# Altium PCB PCB1.PcbDoc
Units mil, origin at the board's own origin, x right, y up, seen from the top; angles counter-clockwise.
Board outline 6000 x 4000 mil, 2 copper layers (Top Layer, Bottom Layer); 11 components, 128 nets, 309 pads, 12 vias.
Unrouted connection lines stored in the file: 129.
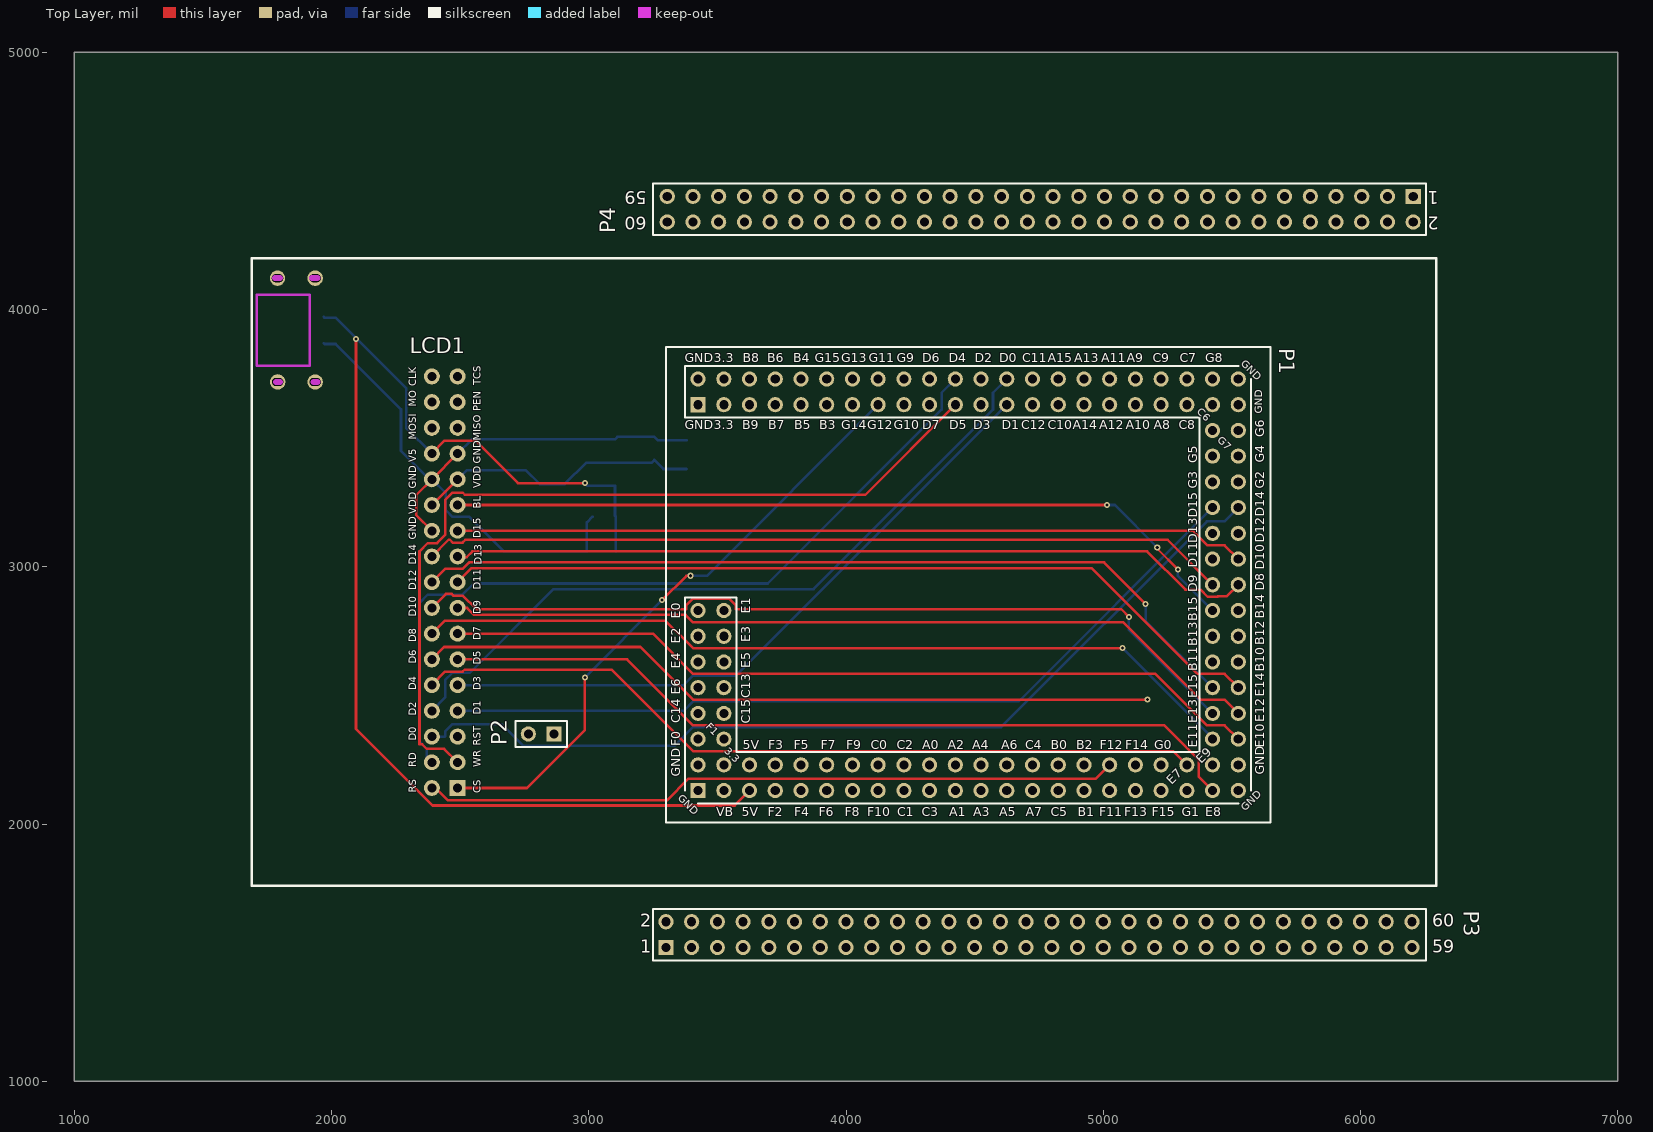
[diagram p0: Top Layer view]
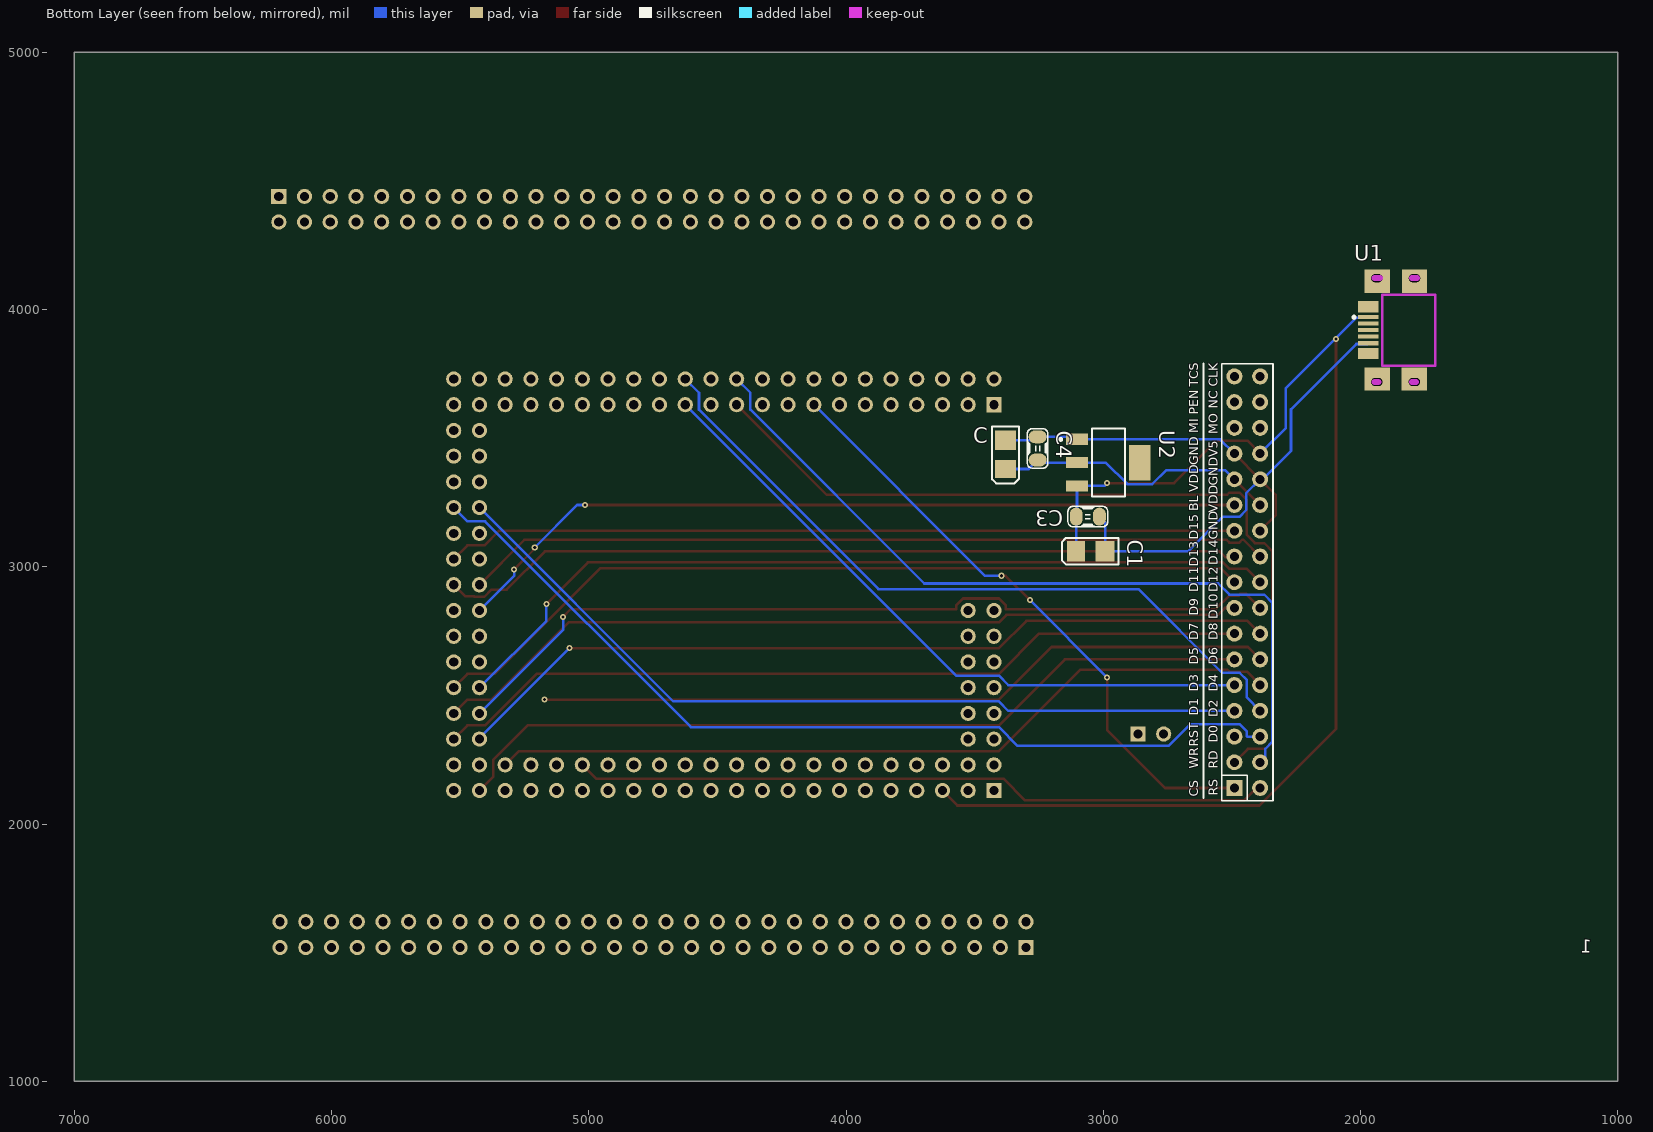
[diagram p1: Bottom Layer view, seen from below]

## Layer stack, top to bottom
Top Solder: solder mask 0.4, Solder Resist, Dk 3.5
Top Layer: signal copper 1.4
Dielectric 1: dielectric 12.6, FR-4, Dk 4.8
Bottom Layer: signal copper 1.4
Bottom Solder: solder mask 0.4, Solder Resist, Dk 3.5

## Board outline
1000,1000 7000,1000 7000,5000 1000,5000

## Design rules (kind name [scope] priority, off if disabled: settings)
Clearance [All] p1: gap=10
PolygonConnect [All] p1: connectstyle=Relief reliefconductorwidth=10 reliefentries=4 polygonreliefangle="90 Angle" airgapwidth=10
RoutingVias [All] p1: holewidth=28 width=50 viastyle="Through Hole" minholewidth=28 minwidth=50 maxholewidth=28 maxwidth=50
SolderMaskExpansion [All] p1: expansion=4
Width [All] p1: maxlimit=10 minlimit=10 preferedwidth=10
30 further rules are at their usual default settings.

## Components (designator, comment, footprint, x,y, rotation, side; value= is the part's Value field where it differs from the comment)
C "Cap Pol3" CAP_SMD_3216 3380,3380 r90 bottom
C1 "Cap Pol3" CAP_SMD_3216 3105,3060 r180 bottom
C3 "Cap" 0805C 3015,3195 r0 bottom
C4 "Cap" 0805C 3255,3505 r270 bottom
LCD1 "TFT_LCD2" DB2*17-3.5-1 2280,1865 r90 top
P1 "HeaderST" PCBComponent_1-1 4475,2930 r0 top
P2 "Header 2" HDR1X2 2865,2350 r180 top
P3 "Header 30X2" HDR2X30 3300,1520 r0 top
P4 "Header 30X2" HDR2X30 6205,4440 r180 top
U1 "micro USB" "Micro_USB_v2 - duplicate" 1955,3920 r90 bottom
U2 "1117-xx" SOT-223_ 2980,3405 r270 bottom

## Footprints (in the part's own frame and the unit in brackets; to place one, negate y for a bottom-side part, rotate by r counter-clockwise, add the part's x,y. Pads: shape width x height; smd on the part's side, far side on the other; paste and mask are expansions set on the pad)
0805C [mil] "0805封装电容"
  oval 50x70 smd: 1(0,0) 2(90,0)
  silkscreen extent -32,-40 122,40, body extent 3,-25 82,25, height 30
CAP_SMD_3216 [mil] "贴片钽电容，10uF"
  rect 70x80 smd: 1(0,0)
  rect 75x80 smd: 2(112.2,0)
  silkscreen extent -56,-52 165,52, body extent -11,-35 123,35, height 63
DB2*17-3.5-1 [mil]
  rect 62x62 hole 35: 1(275,-210)
  round 62 hole 35: 2(275,-110) 3(375,-210) 4(375,-110) 5(475,-210) 6(475,-110) 7(575,-210) 8(575,-110) 9(675,-210) 10(675,-110) 11(775,-210) 12(775,-110) 13(875,-210) 14(875,-110) 15(975,-210) 16(975,-110) 17(1075,-210) 18(1075,-110) 19(1175,-210) 20(1175,-110) 21(1275,-210) 22(1275,-110) 23(1375,-210) 24(1375,-110) 25(1475,-210) 26(1475,-110) 27(1575,-210) 28(1575,-110) 29(1675,-210) 30(1675,-110) 31(1775,-210) 32(1775,-110) 33(1875,-210) 34(1875,-110)
HDR1X2 [mm] "Connector; Header; 2 Position"
  rect 1.5x1.5 hole 0.9: 1(0,0)
  round 1.5 hole 0.9: 2(2.54,0)
  silkscreen extent -1.27,-1.27 3.81,1.27
HDR2X30 [mm] "Connector; Header; 30x2 Position"
  rect 1.5x1.5 hole 0.9: 1(0,0)
  round 1.5 hole 0.9: 2(0,2.54) 3(2.54,0) 4(2.54,2.54) 5(5.08,0) 6(5.08,2.54) 7(7.62,0) 8(7.62,2.54) 9(10.16,0) 10(10.16,2.54) 11(12.7,0) 12(12.7,2.54) 13(15.24,0) 14(15.24,2.54) 15(17.78,0) 16(17.78,2.54) 17(20.32,0) 18(20.32,2.54) 19(22.86,0) 20(22.86,2.54) 21(25.4,0) 22(25.4,2.54) 23(27.94,0) 24(27.94,2.54) 25(30.48,0) 26(30.48,2.54) 27(33.02,0) 28(33.02,2.54) 29(35.56,0) 30(35.56,2.54) 31(38.1,0) 32(38.1,2.54) 33(40.64,0) 34(40.64,2.54) 35(43.18,0) 36(43.18,2.54) 37(45.72,0) 38(45.72,2.54) 39(48.26,0) 40(48.26,2.54) 41(50.8,0) 42(50.8,2.54) 43(53.34,0) 44(53.34,2.54) 45(55.88,0) 46(55.88,2.54) 47(58.42,0) 48(58.42,2.54) 49(60.96,0) 50(60.96,2.54) 51(63.5,0) 52(63.5,2.54) 53(66.04,0) 54(66.04,2.54) 55(68.58,0) 56(68.58,2.54) 57(71.12,0) 58(71.12,2.54) 59(73.66,0) 60(73.66,2.54)
  silkscreen extent -1.27,-1.27 75.06,3.81
"Micro_USB_v2 - duplicate" [mm]
  round 1.524 hole 0.762 slot 1.1 at 90 deg: 0(-5.125,-0.475) 0(-5.12,-4.175) 0(5.125,-4.191) 0(5.125,-0.475)
  rect 0.4x2 smd: 1(1.3,0.381) 2(0.65,0.381) 3(0,0.381) 4(-0.65,0.381) 5(-1.3,0.381)
  rect 2.3x2.5 smd: ""(-4.826,-4.175) ""(-4.826,-0.508) ""(4.826,-4.191) ""(4.826,-0.508)
  rect 1.1x2 smd: ""(-2.3,0.381) ""(2.3,0.381)
  Keep-Out Layer lines w0.254: -3.5,-6.25 -3.5,-1 ; -3.45,-6.25 3.5,-6.25 3.5,-1 ; -3.45,-1 3.45,-1
  Keep-Out Layer lines w0.6: 5.125,-4.445 5.125,-3.962 ; -5.12,-4.335 -5.12,-3.962 ; 5.125,-0.762 5.125,-0.262 ; -5.125,-0.635 -5.125,-0.262
  silkscreen extent 1.15,1.65 1.4,1.9
PCBComponent_1-1 [mm]
  round 1.5 hole 0.9: 1(-26.67,-2.54) 2(-24.13,-2.54) 3(-26.67,-5.08) 4(-24.13,-5.08) 5(-26.67,-7.62) 6(-24.13,-7.62) 7(-26.67,-10.16) 8(-24.13,-10.16) 9(-26.67,-12.7) 10(-24.13,-12.7) 11(-26.67,-15.24) 12(-24.13,-15.24) 13(-26.67,-17.78) 15(-24.13,-17.78) 16(-24.13,-20.32) 18(-21.59,-20.32) 18(-21.59,-17.78) 19(-19.05,-17.78) 20(-19.05,-20.32) 21(-16.51,-17.78) 22(-16.51,-20.32) 23(-13.97,-17.78) 24(-13.97,-20.32) 25(-11.43,-17.78) 26(-11.43,-20.32) 27(-8.89,-17.78) 28(-8.89,-20.32) 29(-6.35,-17.78) 30(-6.35,-20.32) 31(-3.81,-17.78) 32(-3.81,-20.32) 33(-1.27,-17.78) 34(-1.27,-20.32) 35(1.27,-17.78) 36(1.27,-20.32) 37(3.81,-17.78) 38(3.81,-20.32) 39(6.35,-17.78) 40(6.35,-20.32) 41(8.89,-17.78) 42(8.89,-20.32) 43(11.43,-17.78) 44(11.43,-20.32) 45(13.97,-17.78) 46(13.97,-20.32) 47(16.51,-17.78) 48(16.51,-20.32) 49(19.05,-17.78) 50(19.05,-20.32) 51(21.59,-17.78) 52(21.59,-20.32) 53(24.13,-17.78) 54(24.13,-20.32) 55(26.67,-17.78) 56(26.67,-20.32) 57(26.67,-15.24) 58(24.13,-15.24) 59(26.67,-12.7) 60(24.13,-12.7) 61(26.67,-10.16) 62(24.13,-10.16) 63(26.67,-7.62) 64(24.13,-7.62) 65(26.67,-5.08) 66(24.13,-5.08) 67(26.67,-2.54) 68(24.13,-2.54) 69(26.67,0) 70(24.13,0) 71(26.67,2.54) 72(24.13,2.54) 73(26.67,5.08) 74(24.13,5.08) 75(26.67,7.62) 76(24.13,7.62) 77(26.67,10.16) 78(24.13,10.16) 79(26.67,12.7) 80(24.13,12.7) 81(26.67,15.24) 82(24.13,15.24) 83(26.67,17.78) 84(26.67,20.32) 85(24.13,17.78) 86(24.13,20.32) 87(21.59,17.78) 88(21.59,20.32) 89(19.05,17.78) 90(19.05,20.32) 91(16.51,17.78) 92(16.51,20.32) 93(13.97,17.78) 94(13.97,20.32) 95(11.43,17.78) 96(11.43,20.32) 97(8.89,17.78) 98(8.89,20.32) 99(6.35,17.78) 100(6.35,20.32) 101(3.81,17.78) 102(3.81,20.32) 103(1.27,17.78) 104(1.27,20.32) 105(-1.27,17.78) 106(-1.27,20.32) 107(-3.81,17.78) 108(-3.81,20.32) 109(-6.35,17.78) 110(-6.35,20.32) 111(-8.89,17.78) 112(-8.89,20.32) 113(-11.43,17.78) 114(-11.43,20.32) 115(-13.97,17.78) 116(-13.97,20.32) 117(-16.51,17.78) 118(-16.51,20.32) 119(-19.05,17.78) 120(-19.05,20.32) 121(-21.59,17.78) 122(-21.59,20.32) 123(-24.13,17.78) 124(-24.13,20.32) 126(-26.67,20.32)
  rect 1.5x1.5 hole 0.9: 14(-26.67,-20.32) 125(-26.67,17.78)
  silkscreen extent -29.84,-23.49 29.84,23.49
SOT-223_ [mm] "SOT-223/SC-73; 4 Leads; Body 6.7 x 7.3 mm, inc. leads (LxW max)"
  rect 1.1x2.15 smd: 1(-2.3,-3.1) 2(0,-3.1) 3(2.3,-3.1)
  rect 3.5x2.15 smd: 4(0,3.1)
  silkscreen extent -3.35,-4.85 3.35,1.62, body extent -3.25,-3.58 3.25,3.38, height 1.65

## Part data
C C1: "Polarized Capacitor (Surface Mount)"
C3 C4: "Capacitor"
P1 P3 P4: "Header, 30-Pin, Dual row"
P2: "Header, 2-Pin"
U1: library part usb-STM
U2: "稳压芯片"

## Via types
v1: diameter 23.62, hole 11.81, Top Layer to Bottom Layer, 12 vias

## Nets (pads, with @x,y where several pads share a name; then routed paths per layer and width w, separated by ;. In a path a pad name is that pad's centre, name@x,y a point inside that pad or via, vN(x,y) a via of type N, cw(c..) or ccw(c..) an arc to the next point about the centre after c; other vN are vias at no path point)
FSMC_A6: LCD1.2 P1.45 P3.45 | length 2712
  Top Layer w10: LCD1.2 2403.96,2140 2451.96,2092 3303.9,2092 3388.43,2176.53 4971.53,2176.53 P1.45
FSMC_D0: LCD1.6 P1.75 P4.9 | length 3584.7
  Bottom Layer w10: LCD1.6 2440.91,2340 2442,2341.09 2442,2359.88 2470.12,2388 2661.2,2388 2745.73,2303.47 3332.67,2303.47 3405.73,2376.53 4602.64,2376.53 5402.64,3176.53 5471.53,3176.53 P1.75
FSMC_D1: LCD1.7 P1.76 P4.10 | length 3262.2
  Bottom Layer w10: LCD1.7 3369.2,2440 3405.73,2476.53 4671.53,2476.53 P1.76
FSMC_D2: LCD1.8 P1.102 P4.36 | length 2847.6
  Bottom Layer w10: LCD1.8 2442,2492 2442,2559.88 2470.12,2588 2538,2588 2863,2913 3873.8,2913 4571.53,3610.73 4571.53,3676.53 P1.102
FSMC_D3: LCD1.9 P1.101 P4.35 | length 2586.5
  Bottom Layer w10: LCD1.9 3369.2,2540 3405.73,2576.53 3571.53,2576.53 P1.101
FSMC_D4: LCD1.10 P1.51 P3.51 | length 3113.1
  Top Layer w10: LCD1.10 2442,2592 2509.88,2592 2517.88,2600 3089.2,2600 3405.73,2283.47 5271.53,2283.47 P1.51
FSMC_D5: LCD1.11 P1.54 P3.54 | length 3184.8
  Top Layer w10: LCD1.11 3149.2,2640 3405.73,2383.47 5237.33,2383.47 5371.53,2249.27 5371.53,2183.47 P1.54
FSMC_D6: LCD1.12 P1.53 P3.53 | length 2886.1
  Top Layer w10: LCD1.12 2438,2688 3201.2,2688 3405.73,2483.47 v1(5171.53,2483.47)
FSMC_D7: LCD1.13 P1.57 | length 3204.8
  Top Layer w10: LCD1.13 3249.2,2740 3405.73,2583.47 5202.64,2583.47 5402.64,2383.47 5471.53,2383.47 P1.57
FSMC_D8: LCD1.14 P1.58 | length 3246.3
  Top Layer w10: LCD1.14 2440,2790 3299.2,2790 3405.73,2683.47 v1@5071.53,2683.47
  Bottom Layer w10: v1(5075,2685) 5425,2335 P1.58
FSMC_D9: LCD1.15 P1.59 | length 3204.8
  Top Layer w10: LCD1.15 2526.77,2840 2553.77,2813 3376.2,2813 3405.73,2783.47 5078.47,2783.47 5378.47,2483.47 5471.53,2483.47 P1.59
FSMC_D10: LCD1.16 P1.60 | length 3330.8
  Top Layer w10: LCD1.16 2445,2895 2467.12,2895 2474.12,2888 2509.88,2888 2562.88,2835 3378.47,2835 3378.47,2849.27 3405.73,2876.53 3544.27,2876.53 3571.53,2849.27 3571.53,2835 5070,2835 v1(5100,2805)
  Bottom Layer w10: v1(5100,2805) 5100,2755 P1.60
FSMC_D11: LCD1.17 P1.61 | length 3250.4
  Top Layer w10: LCD1.17 2545,2995 4955.11,2995 5366.64,2583.47 5471.53,2583.47 P1.61
FSMC_D12: LCD1.18 P1.62 | length 3306.7
  Top Layer w10: LCD1.18 2442,2992 2509.88,2992 2532.88,3015 2533.89,3015 2535.89,3017 5003,3017 v1(5165,2855)
  Bottom Layer w10: v1(5165,2855) 5165,2790 P1.62
FSMC_D13: LCD1.19 P1.69 P4.3 | length 3138.2
  Top Layer w10: LCD1.19 2493,3037 2524.77,3037 2547.77,3060 5170,3060 5319.27,2910.73 5378.47,2910.73 5405.73,2883.47 5444.27,2883.47 5445.8,2885 5480,2885 P1.69
FSMC_D14: LCD1.20 P1.70 P4.4 | length 3143.5
  Top Layer w10: LCD1.20 2455,3105 2459.95,3105 2470.95,3094 2509.05,3094 2520.05,3105 5250,3105 P1.70
FSMC_D15: LCD1.21 P1.71 P4.5 | length 3080.6
  Top Layer w10: LCD1.21 5349.2,3140 5405.73,3083.47 5471.53,3083.47 P1.71
FSMC_NE4: LCD1.1 P1.111 P4.45 | length 2372.3
  Top Layer w10: LCD1.1 2760,2140 2985,2365 v1(2985,2570) ; v1(3285,2870) 3380,2965 v1(3395,2965)
  Bottom Layer w10: v1(2985,2570) v1(3285,2870) ; v1(3395,2965) 3460,2965 P1.111
FSMC_NOE: LCD1.4 P1.106 P4.40 | length 3121.7
  Bottom Layer w10: LCD1.4 2370.12,2259.88 2370.12,2292 2342,2320.12 2342,2859.88 2374.12,2892 2509.88,2892 2552.88,2935 3695.8,2935 4371.53,3610.73 4371.53,3676.53 P1.106
FSMC_NWE: LCD1.3 P1.105 P4.39 | length 3332.2
  Top Layer w10: LCD1.3 2438,2292 2370.12,2292 2352.12,2310 2342,2310 2342,3059.88 2374.12,3092 2409.88,3092 2442,3124.12 2442,3259.88 2470.12,3288 2509.88,3288 2517.88,3280 4075,3280 P1.105
GND: C1.2 C3.1 C4.1 C.2 LCD1.22 LCD1.26 LCD1.27 U1.5 U2.1 | length 2948.2
  Top Layer w10: LCD1.22 2330,3200 2330,3280 LCD1.26 LCD1.27
  Bottom Layer w10: U1.5 1972.72,3866.1 2015.58,3866.1 2270,3611.68 2270,3450 2380,3340 LCD1.26 2444,3286 2444,3220.95 2470.95,3194 2536,3194 2670,3060 C1.2 2992.8,3172.8 C3.1 ; LCD1.27 2545.55,3495.55 U2.1 3111.5,3505 C4.1 3267.8,3492.2 C.2
H1: P1.1 P3.1
H2: P1.2 P3.2
H3: P1.3 P3.3
H4: P1.4 P3.4
H5: P1.5 P3.5
H6: P1.6 P3.6
H7: P1.7 P3.7
H8: LCD1.33 P1.8 P3.8
H9: P1.9 P3.9
H10: P1.10 P3.10
H11: P1.11 P3.11
H12: P1.12 P3.12
H13: P1.13 P3.13
H14: P1.14 P3.14
H15: P1.15 P3.15
H16: P1.16 P3.16
H17: C1.1 C3.2 LCD1.28 P1.18 P3.17 P3.18 U1.1 U2.3 | length 4983.9
  Top Layer w10: v1(2095,3885) 2095,2369.95 2392.95,2072 3567,2072 P1.18@3625,2130 ; LCD1.28 2440,3490 2560,3490 2725,3325 v1(2985,3325)
  Bottom Layer w10: U1.1 1972.72,3968.46 2015.58,3968.46 2290,3694.05 2290,3540 LCD1.28 ; v1(2985,3325) 2995.55,3314.45 U2.3 3102.05,3197.95 C3.2 C1.1
H19: P1.19 P3.19
H20: P1.20 P3.20
H21: P1.21 P3.21
H22: P1.22 P3.22
H23: P1.23 P3.23
H24: P1.24 P3.24
H25: P1.25 P3.25
H26: P1.26 P3.26
H27: P1.27 P3.27
H28: P1.28 P3.28
H29: P1.29 P3.29
H30: P1.30 P3.30
H31: P1.31 P3.31
H32: P1.32 P3.32
H33: P1.33 P3.33
H34: P1.34 P3.34
H35: P1.35 P3.35
H36: P1.36 P3.36
H37: P1.37 P3.37
H38: P1.38 P3.38
H39: P1.39 P3.39
H40: P1.40 P3.40
H41: LCD1.34 P1.41 P3.41
H42: P1.42 P3.42
H43: LCD1.29 P1.43 P3.43
H44: LCD1.31 P1.44 P3.44
H46: LCD1.30 P1.46 P3.46
H47: P1.47 P3.47
H48: P1.48 P3.48
H49: P1.49 P3.49
H50: P1.50 P3.50
H52: P1.52 P3.52
H55: P1.55 P3.55
H56: P1.56 P3.56
H63: P1.63 P3.57
H64: P1.64 P3.58
H65: P1.65 P3.59
H66: P1.66 P3.60
H67: P1.67 P4.1
H68: LCD1.23 P1.68 P4.2 | length 3122.4
  Top Layer w10: LCD1.23 v1(5015,3240) ; v1(5210,3075) 5210,3070 v1(5290,2990)
  Bottom Layer w10: v1(5015,3240) 5045,3240 v1(5210,3075) ; v1(5290,2990) 5290,2965 P1.68
H72: P1.72 P4.6
H73: P1.73 P4.7
H74: P1.74 P4.8
H77: P1.77 P4.11
H78: P1.78 P4.12
H79: P1.79 P4.13
H80: P1.80 P4.14
H81: P1.81 P4.15
H82: P1.82 P4.16
H83: P1.83 P4.17
H84: P1.84 P4.18
H85: P1.85 P4.19
H86: P1.86 P4.20
H87: P1.87 P4.21
H88: P1.88 P4.22
H89: P1.89 P4.23
H90: P1.90 P4.24
H91: P1.91 P4.25
H92: P1.92 P4.26
H93: P1.93 P4.27
H94: P1.94 P4.28
H95: P1.95 P4.29
H96: P1.96 P4.30
H97: P1.97 P4.31
H98: P1.98 P4.32
H99: P1.99 P4.33
H100: P1.100 P4.34
H103: P1.103 P4.37
H104: P1.104 P4.38
H107: P1.107 P4.41
H108: P1.108 P4.42
H109: P1.109 P4.43
H110: P1.110 P4.44
H112: P1.112 P4.46
H113: P1.113 P4.47
H114: P1.114 P4.48
H115: P1.115 P4.49
H116: P1.116 P4.50
H117: P1.117 P4.51
H118: P1.118 P4.52
H119: P1.119 P4.53
H120: P1.120 P4.54
H121: P1.121 P4.55
H122: P1.122 P4.56
H123: P1.123 P4.57
H124: P1.124 P4.58
H125: P1.125 P4.59
H126: P1.126 P4.60
RESET: LCD1.5 P2.1 P2.2
VCC3.3: C4.2 C.1 LCD1.24 LCD1.25 U2.2 | length 1122.5
  Top Layer w10: LCD1.24 LCD1.25
  Bottom Layer w10: LCD1.25 2526,3376 2754.52,3376 2809.42,3321.1 2906.49,3321.1 2990.39,3405 U2.2 3245,3405 C4.2 3290,3380 C.1
pads on no net: LCD1.32 U1. U1.0 U1.2 U1.3 U1.4 U2.4

## Silkscreen, mask and mechanical layers (free items; w line width, h text height)
Top Overlay:
  lines w10: 1690,1760 1690,4200 6295,4200 6295,1760 1690,1760

## Text inside footprints (layer, text, board x,y; h text height)
LCD1: Top Overlay "D14" at 2328.58,3007.13 h28 r90; Top Overlay "D7" at 2580,2715 h28 r90; Top Overlay "RS" at 2328.58,2121.3 h28 r90; Top Overlay "CS" at 2580,2120 h28 r90; Top Overlay "WR" at 2580,2220 h28 r90; Top Overlay "RST" at 2580,2305 h28 r90; Top Overlay "D1" at 2580,2425 h28 r90; Top Overlay "D2" at 2328.58,2421.5 h28 r90; Top Overlay "D3" at 2580,2520 h28 r90; Top Overlay "D4" at 2328.58,2519.92 h28 r90; Top Overlay "D5" at 2580,2620 h28 r90; Top Overlay "D6" at 2328.58,2623.27 h28 r90; Top Overlay "D8" at 2328.58,2706.93 h28 r90; Top Overlay "D9" at 2580,2815 h28 r90; Top Overlay "D13" at 2584.49,3007.13 h28 r90; Top Overlay "D12" at 2328.58,2908.7 h28 r90; Top Overlay "D15" at 2580,3110 h28 r90; Top Overlay "VDD" at 2580,3305 h28 r90; Top Overlay "V5" at 2328.58,3405.75 h28 r90; Top Overlay "GND" at 2328.58,3302.4 h28 r90; Top Overlay "VDD" at 2328.58,3203.98 h28 r90; Top Overlay "D10" at 2328.58,2805.35 h28 r90; Top Overlay "D0" at 2328.58,2323.07 h28 r90; Top Overlay "RD" at 2328.58,2219.72 h28 r90; Top Overlay "GND" at 2328.58,3105.55 h28 r90; Top Overlay "GND" at 2580,3400 h28 r90; Top Overlay "D11" at 2580,2910 h28 r90; Top Overlay "PEN" at 2580,3605 h28.03 r90; Top Overlay "CLK" at 2328.58,3701.02 h28.03 r90; Top Overlay "MOSI" at 2328.58,3494.33 h28.03 r90; Top Overlay "MO" at 2328.58,3622.28 h28.03 r90; Top Overlay "TCS" at 2580,3705 h28.03 r90; Top Overlay "MISO" at 2580,3490 h28.03 r90; Top Overlay "BL" at 2580,3225 h28 r90; Bottom Overlay "CS" at 2630,2105 h35 r270; Bottom Overlay "RS" at 2555,2110 h35 r270; Bottom Overlay "RD" at 2555,2215 h35 r270; Bottom Overlay "WR" at 2630,2215 h35 r270; Bottom Overlay "D0" at 2555,2315 h35 r270; Bottom Overlay "RST" at 2630,2300 h35 r270; Bottom Overlay "D1" at 2630,2420 h35 r270; Bottom Overlay "D2" at 2555,2415 h35 r270; Bottom Overlay "D3" at 2630,2515 h35 r270; Bottom Overlay "D4" at 2555,2515 h35 r270; Bottom Overlay "D5" at 2630,2620 h35 r270; Bottom Overlay "D6" at 2555,2620 h35 r270; Bottom Overlay "D7" at 2630,2715 h35 r270; Bottom Overlay "D8" at 2555,2715 h35 r270; Bottom Overlay "D9" at 2630,2810 h35 r270; Bottom Overlay "D10" at 2555,2795 h35 r270; Bottom Overlay "D11" at 2630,2900 h35 r270; Bottom Overlay "D12" at 2555,2900 h35 r270; Bottom Overlay "D13" at 2630,3000 h35 r270; Bottom Overlay "D14" at 2555,3005 h35 r270; Bottom Overlay "D15" at 2630,3105 h35 r270; Bottom Overlay "GND" at 2555,3105 h35 r270; Bottom Overlay "BL" at 2630,3215 h35 r270; Bottom Overlay "VDD" at 2555,3210 h35 r270; Bottom Overlay "VDD" at 2630,3290 h35 r270; Bottom Overlay "GND" at 2555,3315 h35 r270; Bottom Overlay "GND" at 2630,3395 h35 r270; Bottom Overlay "V5" at 2555,3425 h35 r270; Bottom Overlay "MI" at 2630,3520 h35 r270; Bottom Overlay "MO" at 2555,3515 h35 r270; Bottom Overlay "PEN" at 2630,3590 h35 r270; Bottom Overlay "NC" at 2555,3615 h35 r270; Bottom Overlay "TCS" at 2630,3700 h35 r270; Bottom Overlay "CLK" at 2555,3700 h35 r270
P1: Top Overlay "GND" at 5625,2191 h35 r90; Top Overlay "3.3" at 3486,3535 h35; Top Overlay "3.3" at 3486,3795 h35; Top Overlay "GND" at 3355,2184 h35 r90; Top Overlay "3.3" at 3525,2281 h30 r315; Top Overlay "5V" at 3598,2290 h35; Top Overlay "VB" at 3495,2030 h35; Top Overlay "5V" at 3595,2030 h35; Top Overlay "B11" at 5366,2593 h35 r90; Top Overlay "B10" at 5625,2592 h35 r90; Top Overlay "E15" at 5366,2489 h35 r90; Top Overlay "E14" at 5625,2494 h35 r90; Top Overlay "E13" at 5366,2392 h35 r90; Top Overlay "E12" at 5625,2395 h35 r90; Top Overlay "E11" at 5366,2297 h35 r90; Top Overlay "E10" at 5625,2296 h35 r90; Top Overlay "E9" at 5382,2233 h35 r45; Top Overlay "E8" at 5396,2030 h35; Top Overlay "E7" at 5267,2150 h35 r45; Top Overlay "G1" at 5306,2030 h35; Top Overlay "G0" at 5198,2290 h35; Top Overlay "F15" at 5189,2030 h35; Top Overlay "F14" at 5086,2290 h35; Top Overlay "F13" at 5082,2030 h35; Top Overlay "F12" at 4986,2290 h35; Top Overlay "F11" at 4984,2030 h35; Top Overlay "B2" at 4896,2290 h35; Top Overlay "B1" at 4901,2030 h35; Top Overlay "B0" at 4795,2290 h35; Top Overlay "C5" at 4796,2030 h35; Top Overlay "C4" at 4697,2290 h35; Top Overlay "A7" at 4698,2030 h35; Top Overlay "A6" at 4603,2290 h35; Top Overlay "A5" at 4595,2030 h35; Top Overlay "A4" at 4491,2290 h35; Top Overlay "A3" at 4494,2030 h35; Top Overlay "A1" at 4401,2030 h35; Top Overlay "A2" at 4396,2290 h35; Top Overlay "A0" at 4296,2290 h35; Top Overlay "C3" at 4295,2030 h35; Top Overlay "C2" at 4197,2290 h35; Top Overlay "C1" at 4200,2030 h35; Top Overlay "C0" at 4096,2290 h35; Top Overlay "F10" at 4083,2030 h35; Top Overlay "F9" at 4001,2290 h35; Top Overlay "F8" at 3995,2030 h35; Top Overlay "F7" at 3902,2290 h35; Top Overlay "F6" at 3895,2030 h35; Top Overlay "F5" at 3797,2290 h35; Top Overlay "F4" at 3798,2030 h35; Top Overlay "F3" at 3698,2290 h35; Top Overlay "F2" at 3696,2030 h35; Top Overlay "F1" at 3453,2377 h30 r315; Top Overlay "F0" at 3355,2302 h35 r90; Top Overlay "C15" at 3627,2389 h35 r90; Top Overlay "C14" at 3355,2391 h35 r90; Top Overlay "C13" at 3627,2488 h35 r90; Top Overlay "E6" at 3355,2502 h35 r90; Top Overlay "E5" at 3627,2606 h35 r90; Top Overlay "E4" at 3355,2603 h35 r90; Top Overlay "E3" at 3627,2707 h35 r90; Top Overlay "E2" at 3355,2701 h35 r90; Top Overlay "E1" at 3627,2818 h35 r90; Top Overlay "E0" at 3355,2798 h35 r90; Top Overlay "B12" at 5625,2694 h35 r90; Top Overlay "B13" at 5366,2691 h35 r90; Top Overlay "B14" at 5625,2798 h35 r90; Top Overlay "B15" at 5366,2788 h35 r90; Top Overlay "D8" at 5625,2907 h35 r90; Top Overlay "D9" at 5366,2901 h35 r90; Top Overlay "D10" at 5625,2989 h35 r90; Top Overlay "D11" at 5366,2996 h35 r90; Top Overlay "D12" at 5625,3093 h35 r90; Top Overlay "D13" at 5366,3091 h35 r90; Top Overlay "D14" at 5625,3195 h35 r90; Top Overlay "D15" at 5366,3190 h35 r90; Top Overlay "G2" at 5625,3304 h35 r90; Top Overlay "G3" at 5366,3303 h35 r90; Top Overlay "G5" at 5366,3402 h35 r90; Top Overlay "G4" at 5625,3404 h35 r90; Top Overlay "G6" at 5625,3504 h35 r90; Top Overlay "G7" at 5441,3490 h30 r315; Top Overlay "C6" at 5361,3600 h30 r315; Top Overlay "G8" at 5397,3795 h35; Top Overlay "C8" at 5293,3535 h35; Top Overlay "C7" at 5298,3795 h35; Top Overlay "A8" at 5196,3535 h35; Top Overlay "C9" at 5192,3795 h35; Top Overlay "A10" at 5087,3535 h35; Top Overlay "A9" at 5092,3795 h35; Top Overlay "A12" at 4985,3535 h35; Top Overlay "A11" at 4993,3795 h35; Top Overlay "A14" at 4882,3535 h35; Top Overlay "A13" at 4888,3795 h35; Top Overlay "A15" at 4784,3795 h35; Top Overlay "C10" at 4785,3535 h35; Top Overlay "C12" at 4682,3535 h35; Top Overlay "C11" at 4686,3795 h35; Top Overlay "D0" at 4596,3795 h35; Top Overlay "D1" at 4605,3535 h35; Top Overlay "D3" at 4495,3535 h35; Top Overlay "D2" at 4500,3795 h35; Top Overlay "D5" at 4401,3535 h35; Top Overlay "D4" at 4399,3795 h35; Top Overlay "D7" at 4296,3535 h35; Top Overlay "D6" at 4296,3795 h35; Top Overlay "G9" at 4197,3795 h35; Top Overlay "G10" at 4185,3535 h35; Top Overlay "G11" at 4089,3795 h35; Top Overlay "G12" at 4082,3535 h35; Top Overlay "G13" at 3982,3795 h35; Top Overlay "G14" at 3981,3535 h35; Top Overlay "B3" at 3896,3535 h35; Top Overlay "G15" at 3879,3795 h35; Top Overlay "B9" at 3597,3535 h35; Top Overlay "B8" at 3598,3795 h35; Top Overlay "B5" at 3798,3535 h35; Top Overlay "B4" at 3794,3795 h35; Top Overlay "B7" at 3698,3535 h35; Top Overlay "B6" at 3694,3795 h35; Top Overlay "GND" at 3373,3795 h35; Top Overlay "GND" at 5553,2047 h30 r45; Top Overlay "GND" at 5619,3594 h30 r90; Top Overlay "GND" at 5533,3788 h30 r315; Top Overlay "GND" at 3344,2098 h30 r315; Top Overlay "GND" at 3373,3535 h35
P3: Top Overlay "2" at 3200,1600 h50; Top Overlay "1" at 3200,1500 h50; Top Overlay "59" at 6280,1500 h50; Top Overlay "60" at 6280,1600 h50; Bottom Overlay "1" at 1100,1500 h50
P4: Top Overlay "2" at 6305,4360 h50 r180; Top Overlay "1" at 6305,4460 h50 r180; Top Overlay "59" at 3225,4460 h50 r180; Top Overlay "60" at 3225,4360 h50 r180; Bottom Overlay "1" at 8405,4460 h50 r180